# Altium PCB PCB1.PcbDoc
Units mil, origin at the board's own origin, x right, y up, seen from the top; angles counter-clockwise.
Board outline 787.4 x 787.4 mil, 4 copper layers (Top Layer, GND, pow, Bottom Layer), stack 30.634 mil thick; 48 components, 41 nets, 222 pads, 74 vias.
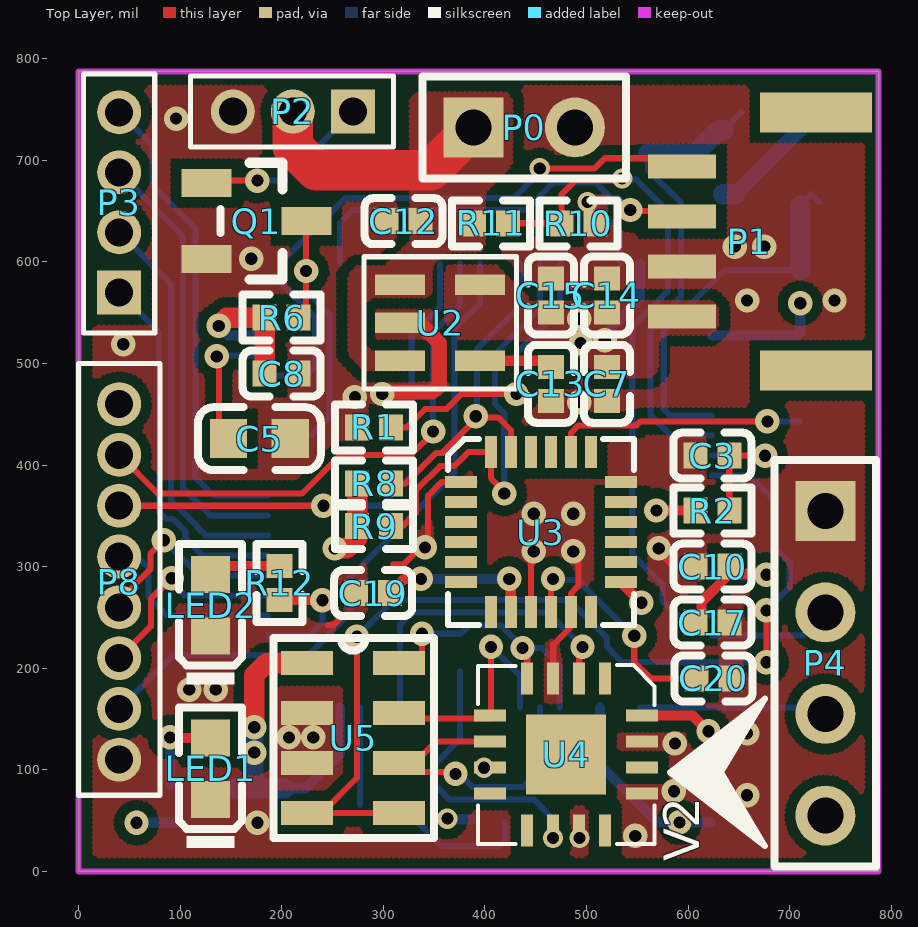
[diagram p0: Top Layer view]
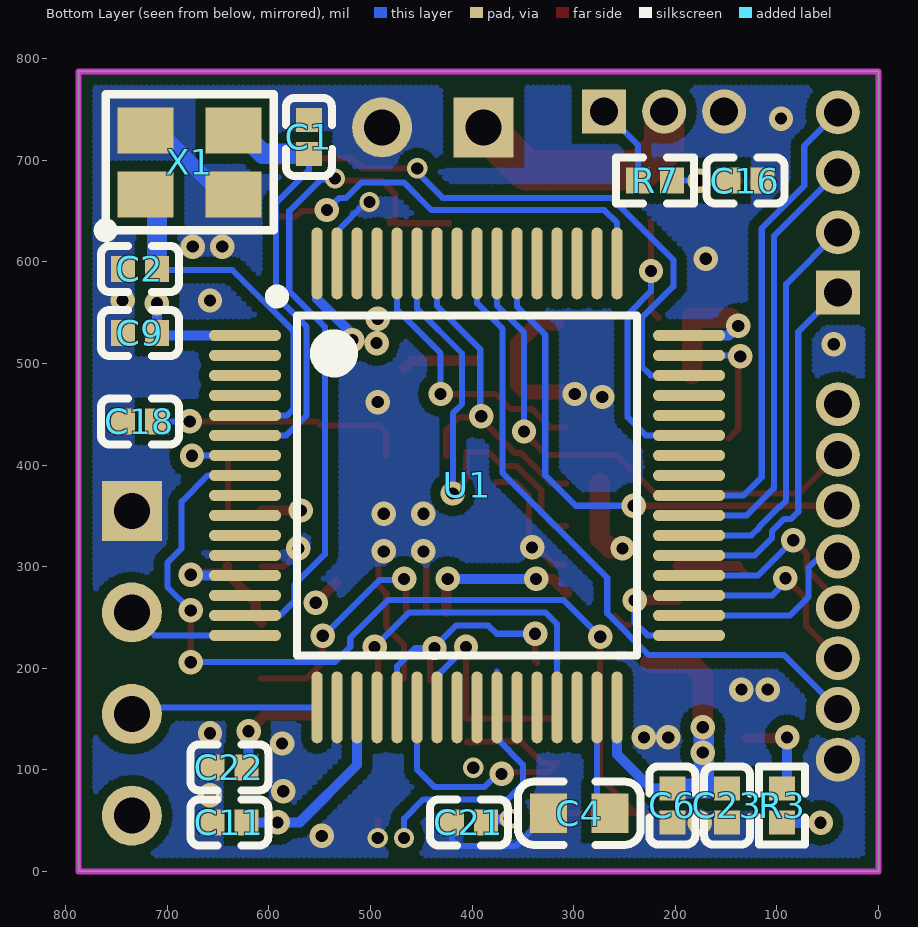
[diagram p1: Bottom Layer view, seen from below]
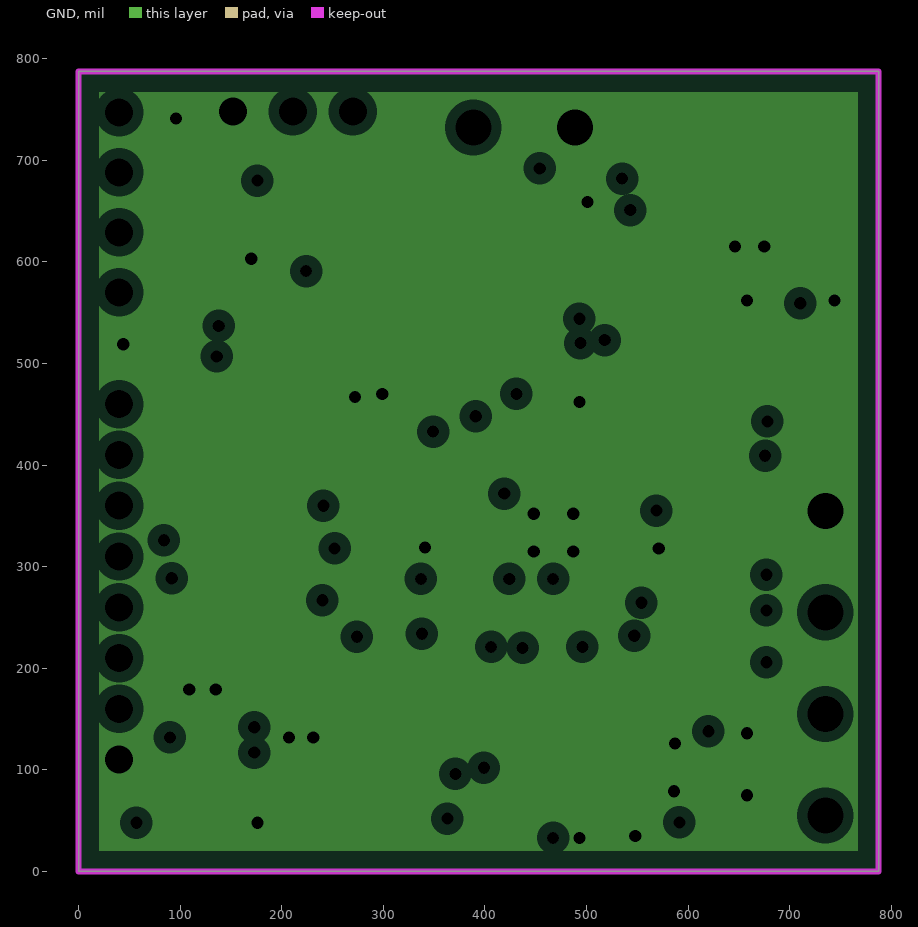
[diagram p2: GND, clearances drawn from the general rule]
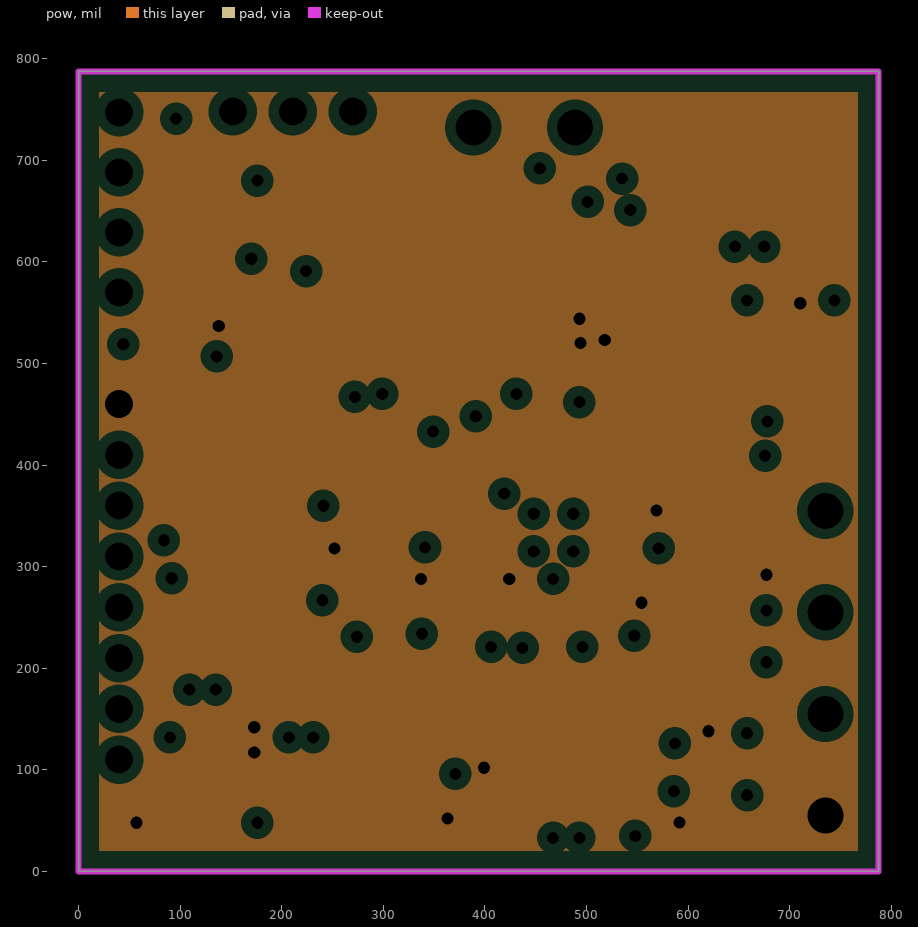
[diagram p3: pow, clearances drawn from the general rule]
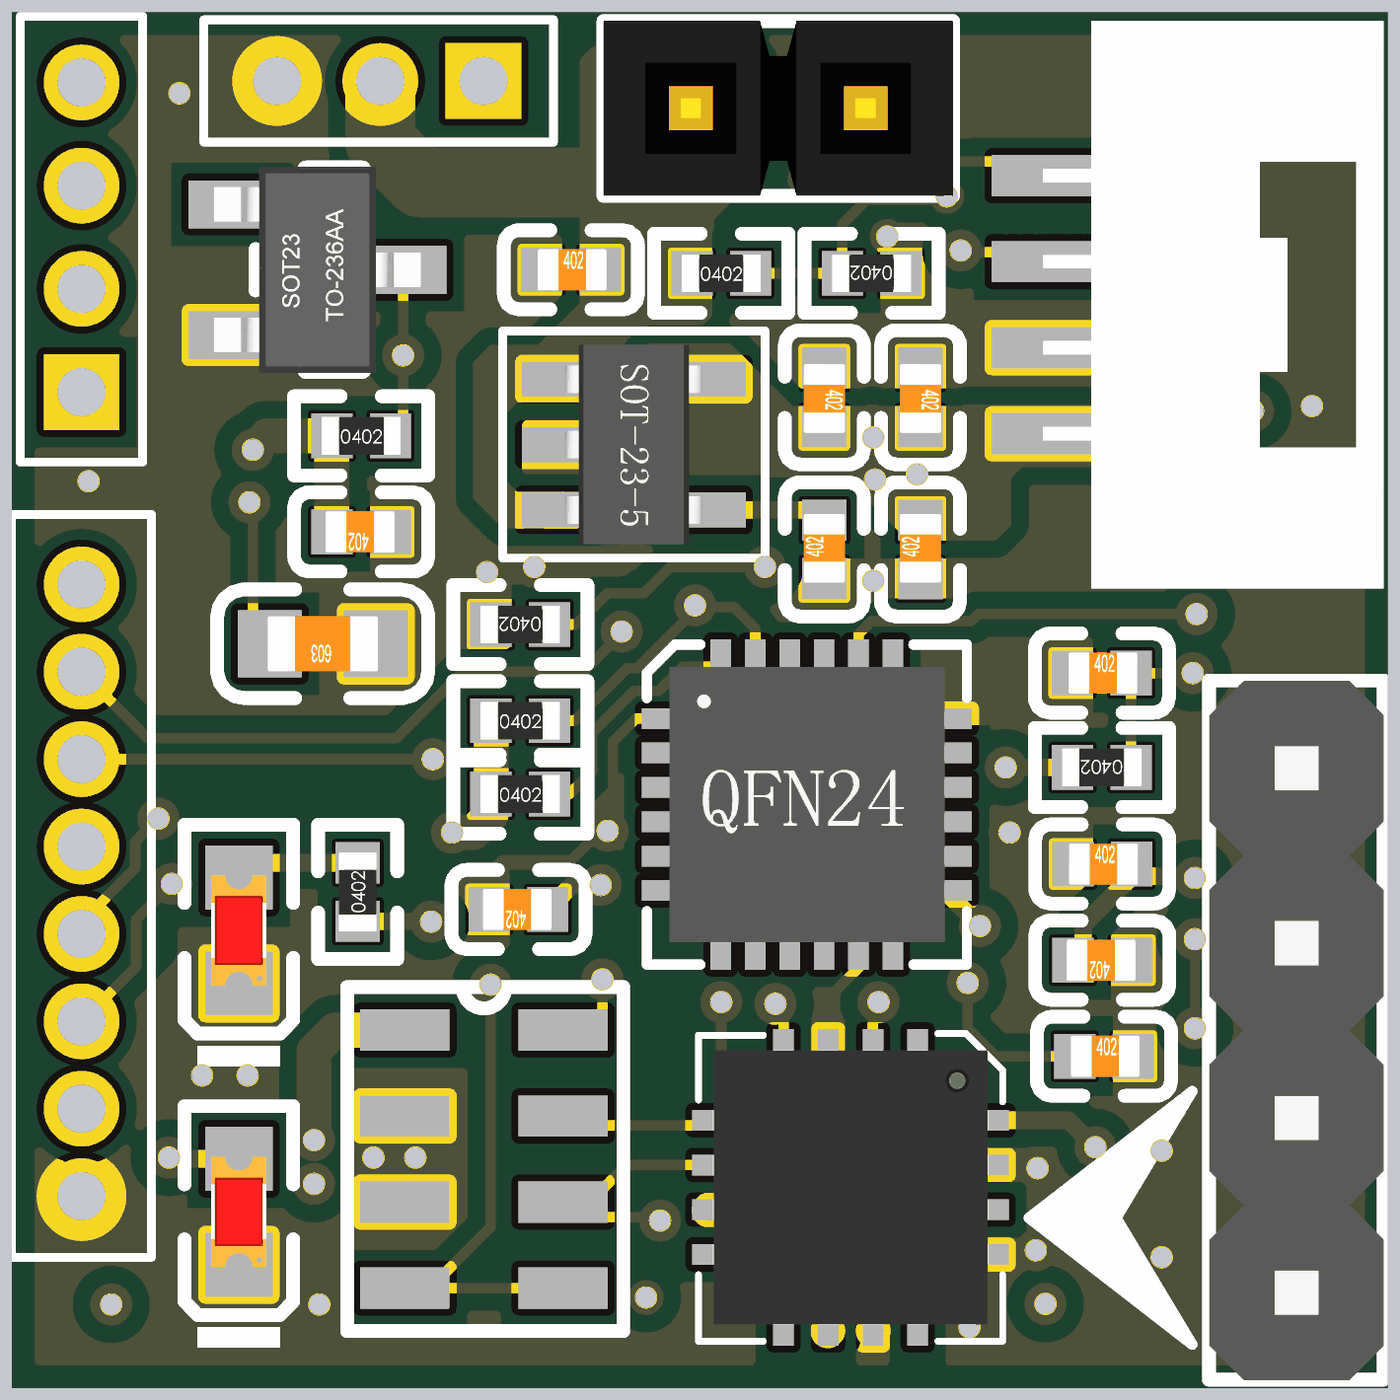
[diagram p4: 3D render of the assembled board from above, using the file's embedded part models]
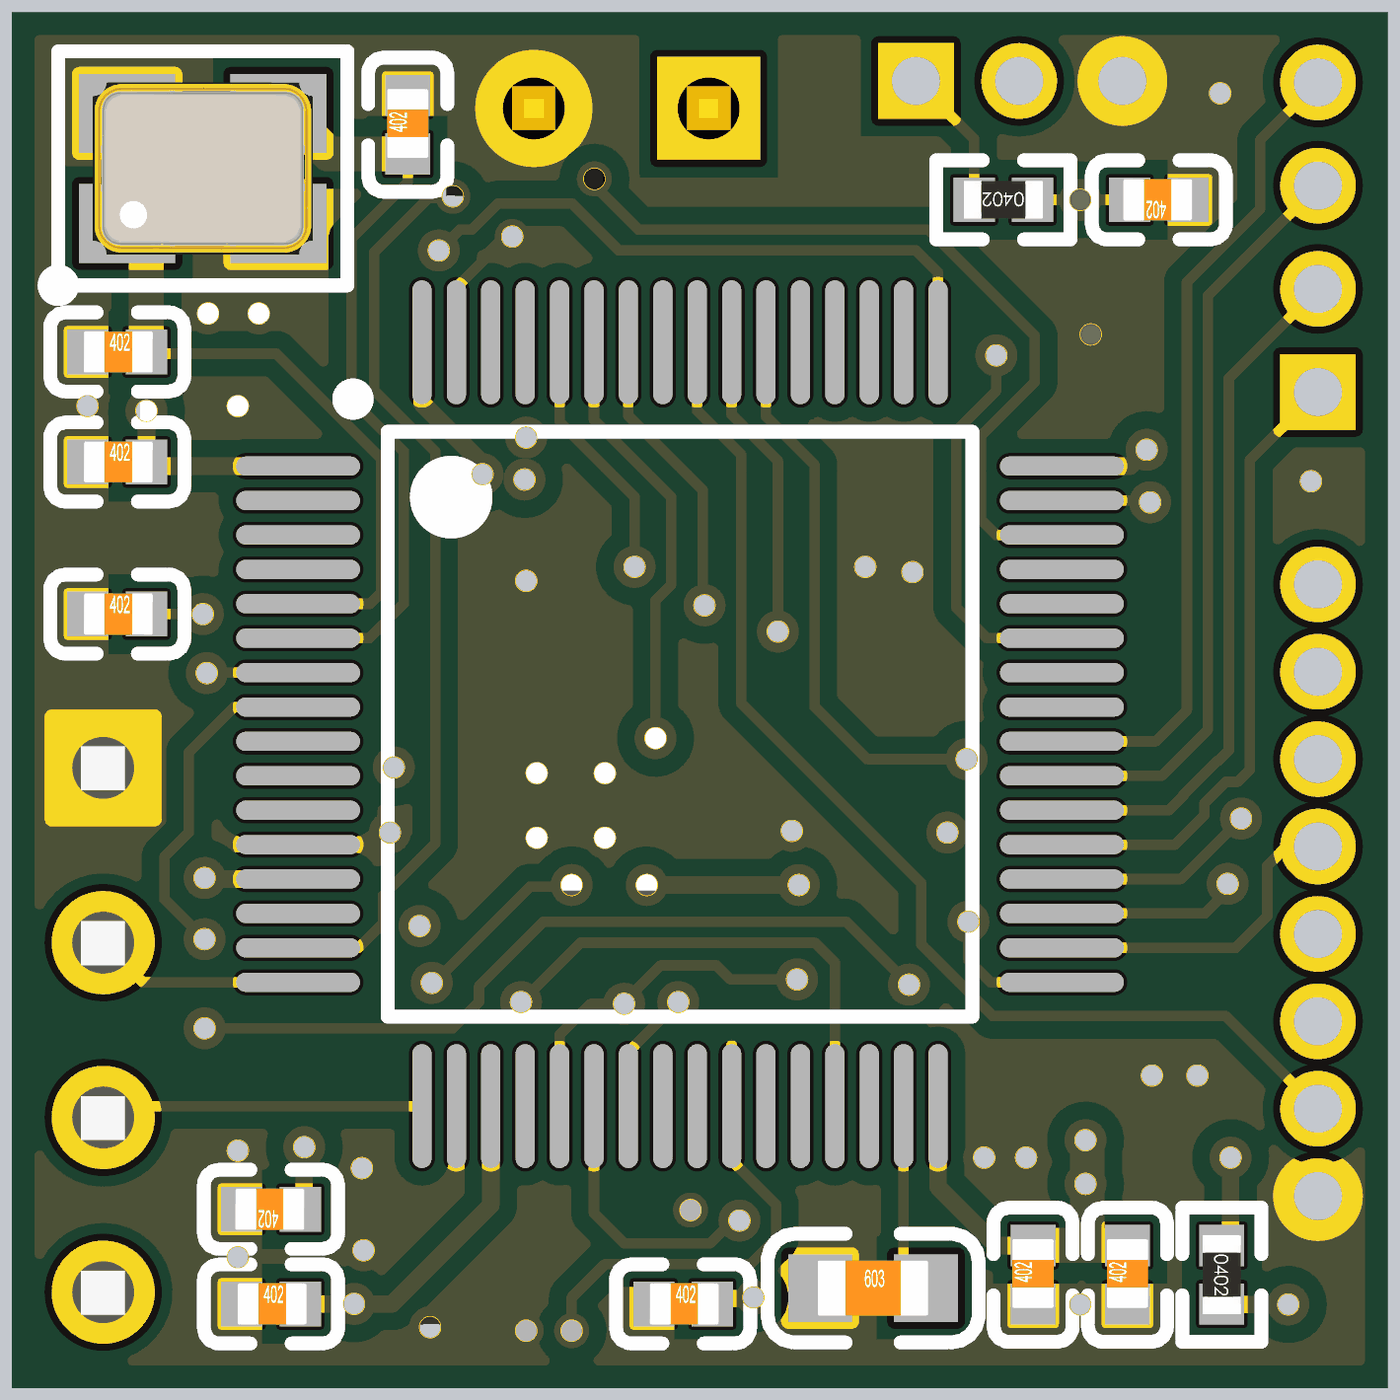
[diagram p5: 3D render of the assembled board from below, using the file's embedded part models]

## Layer stack, top to bottom
Top Solder: solder mask 0.4, Solder Resist, Dk 3.5
Top Layer: signal copper 1.4
Dielectric1: core 10, FR-4, Dk 4.2
GND: plane copper 1.417, net GND
Dielectric 4: prepreg 5, Dk 4.2
pow: plane copper 1.417, net VCC_3V3
Dielectric 3: core 10, Dk 4.2
Bottom Layer: signal copper 1.4
Bottom Solder: solder mask 0.4, Solder Resist, Dk 3.5

## Board outline
0,0 787.4,0 787.4,787.4 0,787.4

## Design rules (kind name [scope] priority, off if disabled: settings)
Clearance Clearance_1 [InPolygon] p1: gap=10
Clearance [All] p2: gap=6
PlaneClearance [All] p1: clearance=10
PlaneConnect [All] p1: planeconnectstyle=Direct reliefexpansion=20 reliefentries=4 reliefconductorwidth=10 reliefairgap=10
PolygonConnect [All] p1: connectstyle=Direct reliefconductorwidth=10 reliefentries=4 polygonreliefangle="90 Angle" airgapwidth=10
RoutingVias [All] p1: holewidth=28 width=50 viastyle="Through Hole" minholewidth=28 minwidth=50 maxholewidth=28 maxwidth=50
SolderMaskExpansion [All] p1: expansion=4
Width [All] p1: maxlimit=40 minlimit=6 preferedwidth=6
28 further rules are at their usual default settings.

## Components (designator, comment, footprint, x,y, rotation, side; value= is the part's Value field where it differs from the comment)
C1 "10pF" "0402 C" 560.74,723 r90 bottom
C2 "10pF" "0402 C" 727,593 r180 bottom
C3 "100nF" "0402 C" 623.75,409.25 r0 top
C4 "2.2uF" "0603 C" 294.55,57.36 r180 bottom
C5 "2.2uF" "0603 C" 178,426 r180 top
C6 "100nF" "0402 C" 203,65 r90 bottom
C7 "100nF" "0402 C" 520,480 r90 top
C8 "100nF" "0402 C" 200,490 r180 top
C9 "100nF" "0402 C" 727,530 r180 bottom
C10 "100nF" "0402 C" 624,300 r0 top
C11 "100nF" "0402 C" 639,48.32 r180 bottom
C12 "100nF" "0402 C" 320,640 r0 top
C13 "100nF" "0402 C" 465,480 r90 top
C14 "100nF" "0402 C" 520,567 r270 top
C15 "100nF" "0402 C" 465,567 r270 top
C16 "220pF" "0402 C" 131,680 r0 bottom
C17 "100nF" "0402 C" 624,245 r180 top
C18 "10nF" "0402 C" 727,443 r180 bottom
C19 "10nF" "0402 C" 290,274 r180 top
C20 "100nF" "0402 C" 625,190 r0 top
C21 "100nF" "0402 C" 403.25,48.32 r180 bottom
C22 "100nF" "0402 C" 639,102.48 r0 bottom
C23 "100nF" "0402 C" 149,65 r90 bottom
LED1 "POW_LED" "0603 LED" 130,101 r90 top
LED2 "USER_LED" "0603 LED" 130,262 r90 top
P0 "POW" HDR1X2 389,732 r0 top
P1 "Debug 4pin" "GH-1.25 4pin" 660,620 r90 top
P2 "3pin 1.5mm" "3pin 1.5mm" 270,748 r180 top
P3 "4pin 1.5mm" "4pin 1.5mm" 40,570 r90 top
P4 "Header 4" HDR1X4 735,355 r270 top
P8 "8pin 1.27mm" "8pin 1.27mm" 40,110 r90 top
Q1 "SS8050" "SOT-23 3pin" 175,640 r180 top
R1 "10K" "0402 R" 291,437 r180 top
R2 "10K" "0402 R" 623.75,355.25 r180 top
R3 "510" "0402 R" 95,65 r270 bottom
R6 "4.7K" "0402 R" 200,545 r0 top
R7 "4.7K" "0402 R" 220,680 r0 bottom
R8 "10K" "0402 R" 291,382 r0 top
R9 "10K" "0402 R" 291,340 r0 top
R10 "TBD" "0402 R" 492,638 r180 top
R11 "TBD" "0402 R" 406,638 r0 top
R12 "510" "0402 R" 198,284 r90 top
U1 "STM32F407VET6_64" "LQFP 64pin" 405,380 r270 bottom locked
U2 "MIC5219" "SOT-23 5pin" 356,540 r270 top
U3 "MPU6050" "QFN 24pin" 455,334 r0 top
U4 "AK8975" AK8975 480,115 r180 top
U5 "MS5611" MS5611 225,205 r0 top
X1 "8MHz" "XTAL_3225 4pin" 678,698 r180 bottom

## Footprints (in the part's own frame and the unit in brackets; to place one, negate y for a bottom-side part, rotate by r counter-clockwise, add the part's x,y. Pads: shape width x height; smd on the part's side, far side on the other; paste and mask are expansions set on the pad)
"3pin 1.5mm" [mm]
  rect 1.1x1.1 hole 0.7: 1(0,0)
  round 1.1 hole 0.7: 2(1.5,0) 3(3,0)
  silkscreen extent -1.02,-0.89 4.06,0.89
"4pin 1.5mm" [mm]
  rect 1.1x1.1 hole 0.7: 1(0,0)
  round 1.1 hole 0.7: 2(1.5,0) 3(3,0) 4(4.5,0)
  silkscreen extent -1.02,-0.89 5.46,0.89
"8pin 1.27mm" [mm]
  round 1.1 hole 0.7: 1(0,0) 2(1.27,0) 3(2.54,0) 4(3.81,0) 5(5.08,0) 6(6.35,0) 7(7.62,0) 8(8.89,0)
  silkscreen extent -0.89,-1.02 9.91,1.02
"0402 C" [mm]
  rect 0.6x0.65 smd mask+0.051: 1(-0.425,0) 2(0.425,0)
  silkscreen extent -0.97,-0.58 0.97,0.58, body extent -0.48,-0.3 0.52,0.3, height 0.2
"0402 R" [mm]
  rect 0.6x0.65 smd mask+0.051: 1(-0.425,0) 2(0.425,0)
  silkscreen extent -0.97,-0.58 0.97,0.58, body extent -0.57,-0.27 0.58,0.28, height 0.41
"0603 C" [mm]
  rect 0.93x0.98 smd: 1(-0.77,0) 2(0.77,0)
  silkscreen extent -1.53,-0.79 1.54,0.79, body extent -0.8,-0.4 0.8,0.4, height 0.3
"0603 LED" [mm]
  rect 0.93x0.98 smd: A(0.77,0) K(-0.77,0)
  silkscreen extent -1.98,-0.79 1.54,0.79, body extent -0.8,-0.4 0.8,0.4, height 0.6
AK8975 [mm]
  rect 2x2 smd: 0(0,0)
  rect 0.3x0.8 smd: 1(-0.975,-1.9) 2(-0.325,-1.9) 3(0.325,-1.9) 4(0.975,-1.9) 9(0.975,1.9) 10(0.325,1.9) 11(-0.325,1.9) 12(-0.975,1.9)
  rect 0.8x0.3 smd: 5(1.9,-0.975) 6(1.9,-0.325) 7(1.9,0.325) 8(1.9,0.975) 13(-1.9,0.975) 14(-1.9,0.325) 15(-1.9,-0.325) 16(-1.9,-0.975)
  silkscreen extent -2.21,-2.24 2.21,2.24, body extent -2,-2 2,2, height 0.92
"GH-1.25 4pin" [mm]
  rect 1x2.8 smd: 0(-3.225,-1.675) 0(3.225,-1.675)
  rect 0.6x1.7 smd: 1(-1.875,1.675) 2(-0.625,1.675) 3(0.625,1.675) 4(1.875,1.675)
  body extent -4.12,-3.17 4.13,1.78, height 4.08
HDR1X2 [mm]
  rect 1.5x1.5 hole 0.9: 1(-0.01,0.007)
  round 1.5 hole 0.9: 2(2.53,0.007)
  silkscreen extent -1.28,-1.26 3.8,1.28, body extent -1.28,-1.26 3.8,1.28, height 8.41
HDR1X4 [mm] "Connector; Header; 4 Position"
  rect 1.5x1.5 hole 0.9: 1(0,0)
  round 1.5 hole 0.9: 2(2.54,0) 3(5.08,0) 4(7.62,0)
  silkscreen extent -1.27,-1.27 8.89,1.27, body extent -1.26,-1.27 8.9,1.27, height 8.54
"LQFP 64pin" [mm]
  oval 0.28x1.8 smd mask+0.051: 1(-3.75,-5.55) 2(-3.25,-5.55) 3(-2.75,-5.55) 4(-2.25,-5.55) 5(-1.75,-5.55) 6(-1.25,-5.55) 7(-0.75,-5.55) 8(-0.25,-5.55) 9(0.25,-5.55) 10(0.75,-5.55) 11(1.25,-5.55) 12(1.75,-5.55) 13(2.25,-5.55) 14(2.75,-5.55) 15(3.25,-5.55) 16(3.75,-5.55) 33(3.75,5.55) 34(3.25,5.55) 35(2.75,5.55) 36(2.25,5.55) 37(1.75,5.55) 38(1.25,5.55) 39(0.75,5.55) 40(0.25,5.55) 41(-0.25,5.55) 42(-0.75,5.55) 43(-1.25,5.55) 44(-1.75,5.55) 45(-2.25,5.55) 46(-2.75,5.55) 47(-3.25,5.55) 48(-3.75,5.55)
  oval 1.8x0.28 smd mask+0.051: 17(5.55,-3.75) 18(5.55,-3.25) 19(5.55,-2.75) 20(5.55,-2.25) 21(5.55,-1.75) 22(5.55,-1.25) 23(5.55,-0.75) 24(5.55,-0.25) 25(5.55,0.25) 26(5.55,0.75) 27(5.55,1.25) 28(5.55,1.75) 29(5.55,2.25) 30(5.55,2.75) 31(5.55,3.25) 32(5.55,3.75) 49(-5.55,3.75) 50(-5.55,3.25) 51(-5.55,2.75) 52(-5.55,2.25) 53(-5.55,1.75) 54(-5.55,1.25) 55(-5.55,0.75) 56(-5.55,0.25) 57(-5.55,-0.25) 58(-5.55,-0.75) 59(-5.55,-1.25) 60(-5.55,-1.75) 61(-5.55,-2.25) 62(-5.55,-2.75) 63(-5.55,-3.25) 64(-5.55,-3.75)
  silkscreen extent -4.87,-4.9 4.25,4.25
MS5611 [mm]
  rect 1.3x0.6 smd: 1(0,0) 2(0,-1.25) 3(0,-2.5) 4(0,-3.75) 5(2.3,-3.75) 6(2.3,-2.5) 7(2.3,-1.25) 8(2.3,0)
  silkscreen extent -0.84,-4.38 3.17,0.63
"QFN 24pin" [mm]
  rect 0.8x0.3 smd: 1(-2,1.25) 2(-2,0.75) 3(-2,0.25) 4(-2,-0.25) 5(-2,-0.75) 6(-2,-1.25) 13(2,-1.25) 14(2,-0.75) 15(2,-0.25) 16(2,0.25) 17(2,0.75) 18(2,1.25)
  rect 0.3x0.8 smd: 7(-1.25,-2) 8(-0.75,-2) 9(-0.25,-2) 10(0.25,-2) 11(0.75,-2) 12(1.25,-2) 19(1.25,2) 20(0.75,2) 21(0.25,2) 22(-0.25,2) 23(-0.75,2) 24(-1.25,2)
  silkscreen extent -2.32,-2.32 2.32,2.32, body extent -2,-2 2.01,2, height 0.9
"SOT-23 3pin" [mm]
  rect 1.25x0.7 smd: 1(1.25,-0.95) 2(1.25,0.95) 3(-1.25,0)
  silkscreen extent -0.65,-1.46 0.9,1.46, body extent -1.5,-1.5 1.5,1.5, height 1.3
"SOT-23 5pin" [mm]
  rect 0.508x1.25 smd: 1(-0.95,-1) 2(0,-1) 3(0.95,-1) 4(0.95,1) 5(-0.95,1)
  silkscreen extent -1.65,-1.91 1.65,1.91, body extent -1.45,-1.4 1.45,1.4
"XTAL_3225 4pin" [mm]
  rect 1.4x1.15 smd: 1(-1.1,-0.8) 2(1.1,-0.8) 3(1.1,0.8) 4(-1.1,0.8)
  silkscreen extent -2.25,-1.85 2.1,1.7, body extent -1.6,-1.25 1.6,1.25, height 0.61

## Part data
C1 C2 C3 C6 C7 C8 C9 C10 C11 C12 C13 C14 C15 C16 C17 C18 C19 C20 C21 C22 C23: library part "0402 C"
C4 C5: library part "0603 C"
LED1 LED2: library part "0603 LED"
P0: library part "Header 2", "Header, 2-Pin"
P4: "Header, 4-Pin"
R1 R2 R3 R6 R7 R8 R9 R10 R11 R12: library part "0402 R"
U3: library part MPU6000/6050
X1: library part XTAL

## Via types
v1: diameter 24, hole 12, Top Layer to Bottom Layer, tented both sides, 67 vias
v2: diameter 20, hole 12, Top Layer to Bottom Layer, tented both sides, 7 vias

## Nets (pads, with @x,y where several pads share a name; then routed paths per layer and width w, separated by ;. In a path a pad name is that pad's centre, name@x,y a point inside that pad or via, vN(x,y) a via of type N, cw(c..) or ccw(c..) an arc to the next point about the centre after c; other vN are vias at no path point)
AD1_IN1_POW: R10.2 R11.2 U1.15 | length 674
  Top Layer w6: R11.2 R10.2 475.27,666.27 489,680 532,680 v2@533,681 ; R10.2@481.27,638 R10.2@481.27,642.27
  Bottom Layer w6: v2@533,681 549,681 580,650 580,571 545,536 545,312 575,282 575,266 588.95,252.05 U1.15
  other v2: 535,682
AK8975_DRDY: U1.26 U4.10 | length 271.2
  Bottom Layer w6: U1.26@375.47,196.53 U1.26 375.47,130.47 350,105 350,86 365,71 448,71 467,52 v2(467,33)
AK8975_SC: U1.29 U4.2 | length 317.2
  Top Layer w6: U4.2@489.8,189.8 U4.2@492.8,192.8 ; U4.2 U4.2@492.8,192.8 ; v1(496,221) 492.8,217.8 U4.2@492.8,192.8
  Bottom Layer w6: U1.29 316.42,243.42 328,255 462,255 v1(496,221)
GND: C1.2 C2.1 C3.1 C4.1 C5.1 C6.1 C7.1 C8.1 C9.1 C10.1 C11.1 C12.1 C13.1 C14.1 C15.1 C16.1 C17.1 C18.1 C19.2 C20.2 C21.1 C22.2 C23.1 LED1.K LED2.K P0.2 P1.2 P2.3 P4.1 P8.1 Q1.2 R1.2 R10.1 U1.12 U1.18 U1.63 U2.2 U3.1 U3.9 U3.11 U3.18 U4.3 U4.11 U4.13 U4.15 U5.2 U5.3 X1.2 X1.4 | length 853.7
  Top Layer w6: 245.25,242.56 250.7,242.56 259.52,251.38 ; 309.68,302.2 320.2,302.2 337,319 v1(341,319) ; v1@344,328 344,370 357.21,383.21 U3.1 ; U3.9 445.16,312.16 v1(448,315) ; U4.3 467.2,223.2 484.53,240.53 U3.11 484.53,273.53 492,281 492,310 v1(487,315) ; U4.11 U4.11@492.8,50.8 ; v1(571,318) 571,315 586,300 C10.1
  Top Layer w15: v1(299,470) 301,472 348,472 355,479 355,520 335,540 U2.2
  Bottom Layer w6: C4.1 357.23,25 414,25 419.99,30.99 C21.1 ; v2(501,659) 504,659 532.95,630.05 U1.63
  Bottom Layer w15: X1.2@646.31,666.5 X1.4@717.31,737.5
  Bottom Layer w20: X1.2 X1.2@646.31,666.5
  other v1: 548,35 176,48 658,75 586,79 587,126 207,132 231,132 658,136 109,179 135,179 448,352 487,352 493,462 272,467 44,519 658,562 744,562 170,603 646,615 675,615 96,741
  other v2: 493,33
I2C1_SCL: R8.2 U1.58 U3.23 | length 344.9
  Top Layer w6: R8.2 322,382 352,412 358,412 391,445 391,447 413,447 425.47,434.53 U3.23@425.47,408.74
  Bottom Layer w6: v1@392,448 392,514 434.53,556.53 U1.58
  other v1: 391,448
I2C1_SDA: R9.2 U1.59 U3.24 | length 431.8
  Top Layer w6: R9.2 319,340 332,353 332,375 356,399 370,399 383.74,412.74 U3.24 ; U3.24@405.79,408.74 405.79,387.21 419,374 v1(419,372)
  Bottom Layer w6: v1(419,372) 419,451 410,460 410,509.79 454.21,554 U1.59
MS5611_CS: U1.8 U5.4 U5.5 | length 974.5
  Top Layer w6: U5.4 U5.4@239.36,57.36 ; v1@274,232 v1(274,231) 274,92 U5.4@239.36,57.36 ; U5.5 U5.4@239.36,57.36 ; v1(677,206) v1(677,257)
  Bottom Layer w6: v1(274,231) 310,267 483,267 520,230 520,221 535,206 v1(677,206) ; U1.8 660.16,389.84 686,364 686,318 700,304 700,280 v1(677,257)
NetC3_2: C3.2 R2.1 U1.7 | length 141.6
  Top Layer w6: R2.1 C3.2 v1(675.75,409.25)
  Bottom Layer w6: U1.7 675.47,409.53 v1(675.75,409.25)
NetC4_2: C4.2 U1.31 | length 95.9
  Bottom Layer w6: C4.2@277.05,65.55 U1.31
NetC5_2: C5.2 U1.47 | length 134.4
  Top Layer w6: v1@138.05,507.95 138.05,435.64 C5.2
  Bottom Layer w6: v1@138.05,507.95 U1.47
  other v1: 136.05,506.95
NetC13_2: C13.2 U2.4 | length 74.8
  Top Layer w10: U2.4 459.4,502.6 C13.2@467,495
NetC16_2: C16.2 Q1.1 R7.1 | length 106.8
  Top Layer w6: Q1.1 128.39,680 v1(176,680)
  Bottom Layer w6: C16.2 R7.1
NetC18_2: C18.2 U3.20 | length 252.3
  Top Layer w6: U3.20@484.53,408.74 484.53,431.53 492,439 549,439 553,443 v1(678,443)
  Bottom Layer w6: v1@679,443 C18.2
NetC20_1: C20.1 U3.10 | length 229.3
  Top Layer w6: U3.10 v1@464.84,286.84 ; v1@547,231 547,206 563,190 C20.1
  Bottom Layer w6: v1@465,287 491,287 546,232 v1(547,232)
  other v1: 467,288
NetLED1_A: LED1.A R3.1 | length 87.3
  Top Layer w6: v1(90,132) v1@90.68,131.32
  Top Layer w10: v1@90.68,131.32 LED1.A
  Bottom Layer w10: R3.1@90,85 v1(90,132)
NetLED2_A: LED2.A R12.2 | length 71.5
  Top Layer w6: LED2.A LED2.A@138.42,300.73
  Top Layer w10: LED2.A@138.42,300.73 R12.2
NetR1_1: R1.1 U1.60 | length 283.2
  Top Layer w6: R1.1 323,437 341,455 362,455 377,470 v1(431,470)
  Bottom Layer w6: v1(431,470) 431,510 473.9,552.9 U1.60
NetR12_1: R12.1 U1.33 | length 122.7
  Top Layer w10: R12.1 v1@240,267.27
  Bottom Layer w6: U1.33 227.36,232.36 240,245 v1(240,267)
OSC_IN: C2.2 U1.5 X1.1 | length 376.7
  Bottom Layer w6: U1.5 582.1,448.9 576,455 576,532 636,592 C2.2@710.87,592 ; X1.1@710.27,655.46 X1.1 X1.1@729,658.81
  Bottom Layer w20: C2.2 X1.1@710.27,655.46 ; C2.2@710.87,592 C2.2@710.84,593.02
OSC_OUT: C1.1 U1.6 X1.3 | length 460.8
  Bottom Layer w6: C1.1 560.74,690.26 593,658 593,566 563,536 563,449 582.79,429.21 U1.6 ; X1.3 X1.3@652.73,747.54
  Bottom Layer w20: C1.1 606.27,706.27 629.5,729.5 X1.3
RF_CE: P8.7 U1.55 | length 527.1
  Top Layer w6: P8.7 78,372 220,372 258,410 327,410 349,432 v1@349,431
  Bottom Layer w6: v1(349,433) 349,530.53 375.47,557 U1.55
RF_CS: P8.6 U1.54 | length 522.4
  Top Layer w6: P8.6 v1(241,360)
  Bottom Layer w6: v1@239,360 298,360 328,390 328,528.21 355.79,556 U1.54
RF_IRQ: P8.2 U1.56 | length 663.5
  Bottom Layer w6: P8.2 93,213 226,213 267,254 267,289 370,392 370,534 395.16,559.16 U1.56
SBUS_IN: P2.1 R7.2 | length 81.8
  Bottom Layer w6: R7.2 236.73,714.73 P2.1
SPI1_MISO: U1.22 U4.6 U5.6 | length 326.1
  Top Layer w6: v1@371,98 324.13,98 U5.6 330.57,106.57 351.8,127.8 U4.6 ; U4.6@395,127 U4.6@405,127
  Bottom Layer w6: v1@371,100 388,83 437,83 454.21,100.21 U1.22
  other v1: 371,96
SPI1_MOSI: U1.23 U4.5 U5.7 | length 239.4
  Top Layer w6: U5.7@318.15,158.39 U5.7 320.95,150.39 405.2,150.39 405,150.58 406,151.58 v1(406,221) v1@405,222
  Bottom Layer w6: v1(406,221) 434.53,192.47 U1.23
SPI1_SCK: U1.21 U4.4 U5.8 | length 271
  Top Layer w6: U5.8 U5.8@317,206.45 ; U5.8@336,206.45 336,205 338,207 v1(338,234) ; v1@336,231 v1@339,234 ; v1(437,220) 441.61,215.39 U4.4 U4.4@441.61,187.8
  Bottom Layer w6: v1@335,234 376,234 384,242 416,242 438,220 456,220 473.9,202.1 U1.21
SPI2_MISO: P8.3 U1.35 | length 210
  Top Layer w6: P8.3 71.25,241.25 71.25,268.2 v1(91.65,288.65)
  Bottom Layer w6: v1(91.65,288.65) 87.6,288.65 104.52,271.73 U1.35
SPI2_MOSI: P8.4 U1.36 | length 201
  Top Layer w6: P8.4 40,266.65 70.65,297.3 70.65,312.65 v1(84,326)
  Bottom Layer w6: v1(84,326) 118.58,291.42 U1.36
SPI2_SCK: P8.5 U1.34 | length 187.5
  Bottom Layer w6: P8.5 58,310 69,299 69,270 86.95,252.05 U1.34
SWCLK: P1.3 U1.49 | length 407.4
  Top Layer w6: v1@543,650 568,650 573.39,644.61 P1.3
  Bottom Layer w6: U1.49 257.36,638.36 270,651 440,651 467,678 509,678 524,663 531,663 v1(543,651) ; v1@543,650 v1@544,650
SWDIO: P1.4 U1.46 | length 601.8
  Top Layer w6: v2(454,692) 508,692 518,702 585.87,702 P1.4
  Bottom Layer w6: U1.46 224.27,488.27 233,497 233,545 202,576 202,602 263,663 429,663 v2@453,687
TIM8_CH1: P3.1 U1.37 | length 361.3
  Bottom Layer w6: P3.1 79,531 79,354 86,347 92.7,347 105,334.7 105,328 121.9,311.1 U1.37
TIM8_CH2: P3.2 U1.38 | length 395.2
  Bottom Layer w6: P3.2 91,578.06 91,365 97,359 97.67,359 117,339.67 117,339 125.21,330.79 U1.38
TIM8_CH3: P3.3 U1.39 | length 431.7
  Bottom Layer w6: P3.3 103,625.11 103,377 129.53,350.47 U1.39
TIM8_CH4: P3.4 U1.40 | length 469.1
  Bottom Layer w6: P3.4 73.08,714.08 73.08,674.92 115,633 115,388 132.84,370.16 U1.40
UART1_RX: Q1.3 R6.2 U1.43 | length 319.7
  Top Layer w6: R6.2 224.21,552.48 224,552.69 v1(224,591) 224,639.79 Q1.3
  Bottom Layer w6: U1.43 229.21,429.21 247,447 247,548 224,571 v1(224,591)
UART2_RX: P4.3 U1.17 | length 185.1
  Bottom Layer w6: U1.17 728.5,161.5 P4.3
UART2_TX: P4.2 U1.16 | length 120.9
  Bottom Layer w6: U1.16 712.36,232.36 P4.2
VCC_3V3: C6.2 C7.2 C8.2 C9.2 C10.2 C11.2 C14.2 C15.2 C17.2 C19.1 C21.2 C22.1 C23.2 P1.1 P4.4 P8.8 R2.2 R3.2 R6.1 R8.1 R9.1 U1.1 U1.13 U1.19 U1.32 U1.48 U1.64 U2.5 U3.8 U3.13 U4.7 U4.16 U5.1 | length 1546
  Top Layer w6: U4.7@396.2,102.2 U4.7
  Top Layer w10: C19.1 320.73,288 v1(337,288) ; v1@425,288 425.47,287.53 U3.8 ; U3.13 v1(554,264.53) ; U4.16 604.61,153.39 v1(620,138) ; v1(568.75,355.25) R2.2 ; C17.2 613,250.73 613,265 640.73,292.73 C10.2 ; C10.2@640.73,292 641.37,292.63 641,293 676,293 v1(677,292)
  Top Layer w20: v1(138,537) 146,545 R6.1 C8.2 ; v1(173,142) 173,193 185,205 U5.1 ; v1(252,318) 264.27,318 274.27,328 R8.1
  Bottom Layer w6: v1@672.83,296 v1@677.42,291.42 ; v1@674.83,298 677,295.83 v1(677,292) ; C9.2@707.91,527.64 C9.2
  Bottom Layer w10: v1(57,48) R3.2@95,48 ; v1(138,537) 147.36,527.64 U1.48 ; 169,81.73 172,84.73 ; C6.2 223.73,81.73 257.36,115.36 U1.32 ; v1(337,288) v1@425,288 ; v2@363,51.32 C21.2@386.52,51.32 ; U1.19 513.27,104.73 569.68,48.32 C11.2 ; v1@516,525 516,527 552.64,563.64 U1.64 ; v1(620,138) 620,104.75 C22.1 ; U1.13 v1@677.42,291.42 ; U1.1 C9.2@707.91,527.64 ; C9.2 v1(710.27,559.27)
  Bottom Layer w20: C23.2 C6.2 ; 172,84.73 172,141 v1(173,142)
  other v1: 591.47,48.32 173,117 424,288 494,520 518,523 493,544
  other v2: 363,52 399,102
VCC_4V: C12.2 P0.1 P2.2 R11.1 U2.1 U2.3 | length 239.7
  Top Layer w40: P2.2 210.94,713.06 234,690 346.33,690 P0.1
pads on no net: P1.0 U1.2 U1.3 U1.4 U1.9 U1.10 U1.11 U1.14 U1.20 U1.24 U1.25 U1.27 U1.28 U1.30 U1.41 U1.42 U1.44 U1.45 U1.50 U1.51 U1.52 U1.53 U1.57 U1.61 U1.62 U3.2 U3.3 U3.4 U3.5 U3.6 U3.7 U3.12 U3.14 U3.15 U3.16 U3.17 U3.19 U3.21 U3.22 U4.0 U4.1 U4.8 U4.9 U4.12 U4.14

## Polygon pours and split planes (outlines as drawn)
VCC_3V3 on Top Layer " " (hatched 90Degree grid 5 track 6, remove dead copper, pour order 0): 366,595 410,595 445,560 622,560 628,554 628,537 621,530 577,530 569,522 569,495 562,488 535,488 514,488 502,500 478,524 437,524 376,524 362,538 362,591
VCC_4V on Top Layer " " (hatched 90Degree grid 5 track 6, remove dead copper, pour order 4): 328,759 328,620 302,594 275,594 267,586 267,510 282,495 336,495 336,510 288,510 281,517 281,560 288,567 342,567 348,573 348,599 358,609 392,609 399,616 399,670 425,696 425,760 420,765 334,765
GND on Top Layer " " (hatched 90Degree grid 5 track 6, remove dead copper, pour order 6): 0,787.4 0,0 787.4,0 787.4,787.4
GND on Bottom Layer " " (hatched 90Degree grid 5 track 6, remove dead copper, pour order 8): 0,787.4 0,0 787.4,0 787.4,787.4
GND on GND (split plane): 767.3,20.1 20.1,20.1 20.1,767.3 767.3,767.3
VCC_3V3 on pow (split plane): 767.3,20.1 20.1,20.1 20.1,767.3 767.3,767.3

## Keep-outs
Keep-Out Layer:
  the board outline again, w6

## Silkscreen, mask and mechanical layers (free items; w line width, h text height)
Top Overlay:
  lines w6: 621.23,93.97 655,144.97 ; 632,113.97 619,96.97 642,65.97 612,95.97 614,97.97 642,129.97 606,96.97 652,51.97 598,96.97 668.76,158.45 625.95,96.07 665,37.97 590,96.97 664,157.97 ; 582,97.52 675.5,25.02 632,97.52 675.5,170.02 582,97.52
  text "V2" at 611,10 h35 r90